# Altium PCB CP2104PCB.PcbDoc
Units mm, origin at the board's own origin, x right, y up, seen from the top; angles counter-clockwise.
Board outline 33 x 20 mm, 2 copper layers (Top Layer, Bottom Layer); 23 components, 28 nets, 104 pads, 148 vias.
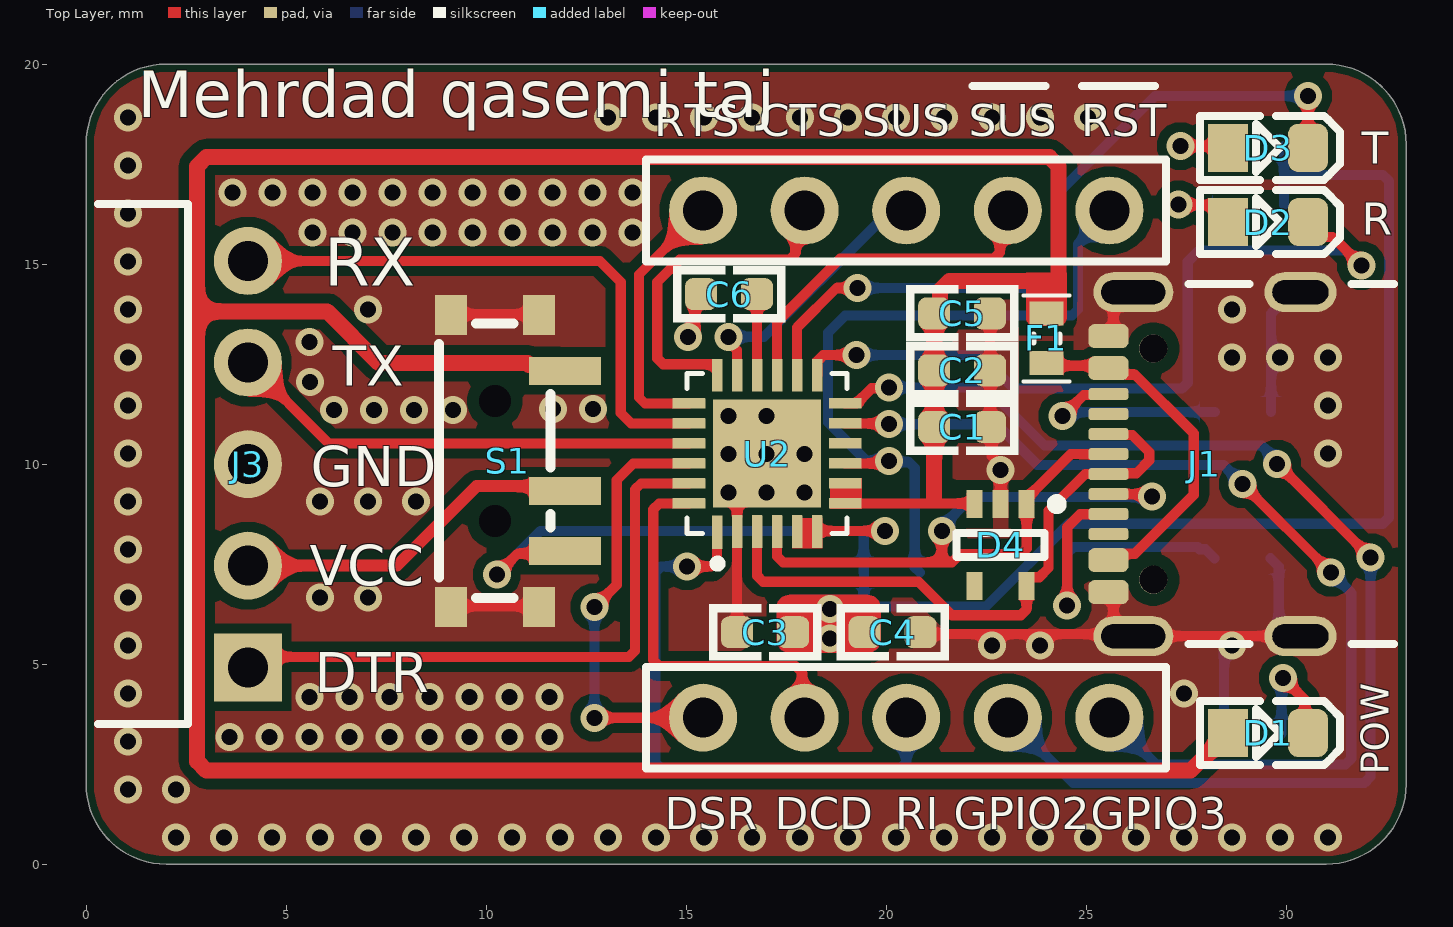
[diagram p0: Top Layer view]
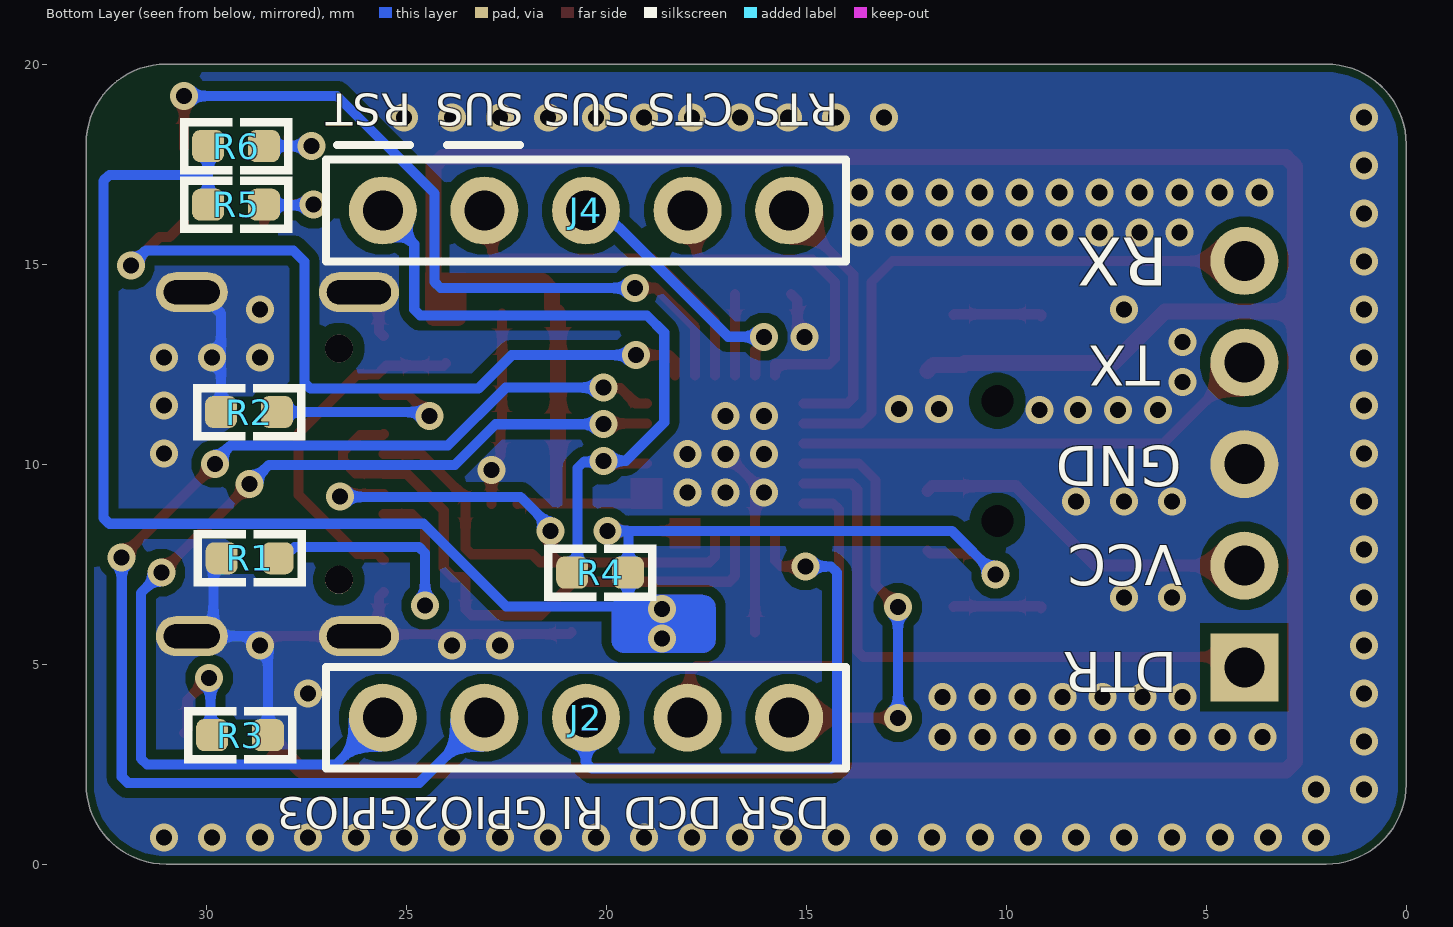
[diagram p1: Bottom Layer view, seen from below]
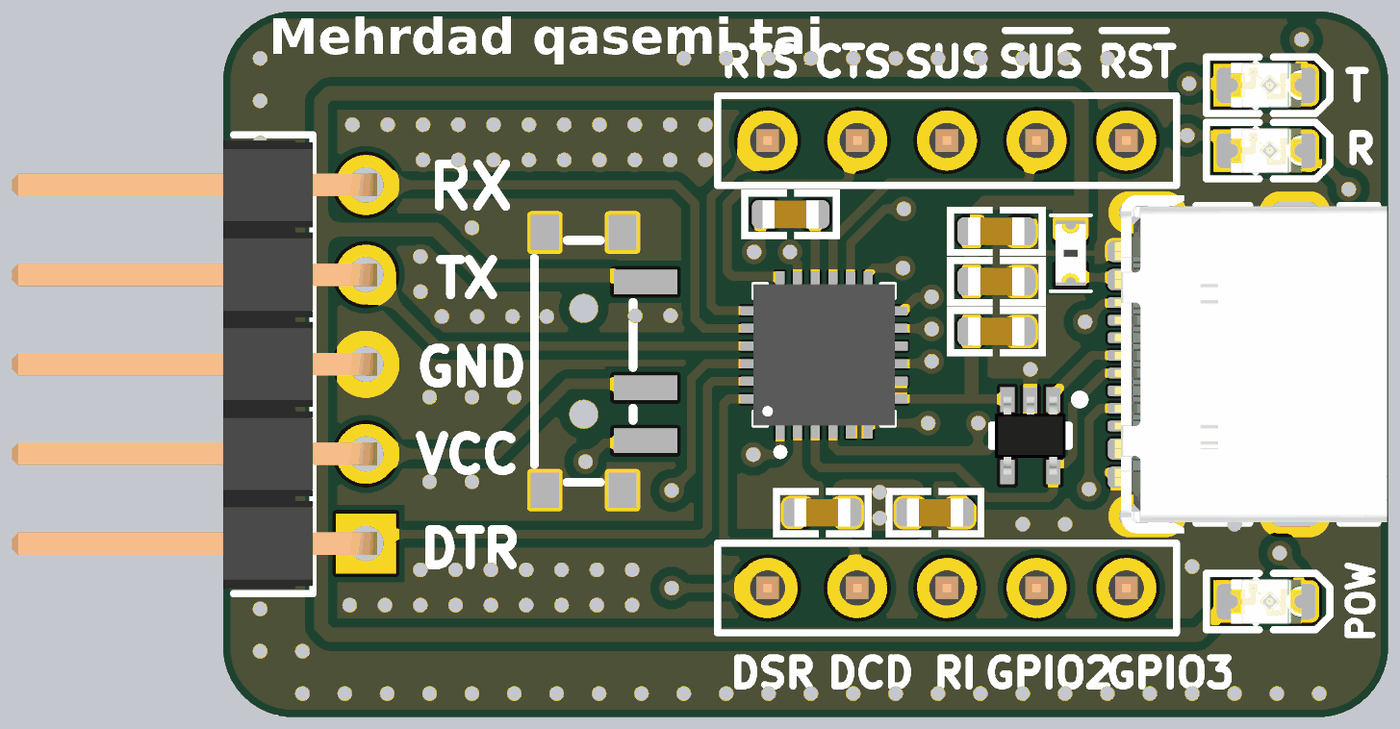
[diagram p2: 3D render of the assembled board from above, using the file's embedded part models]
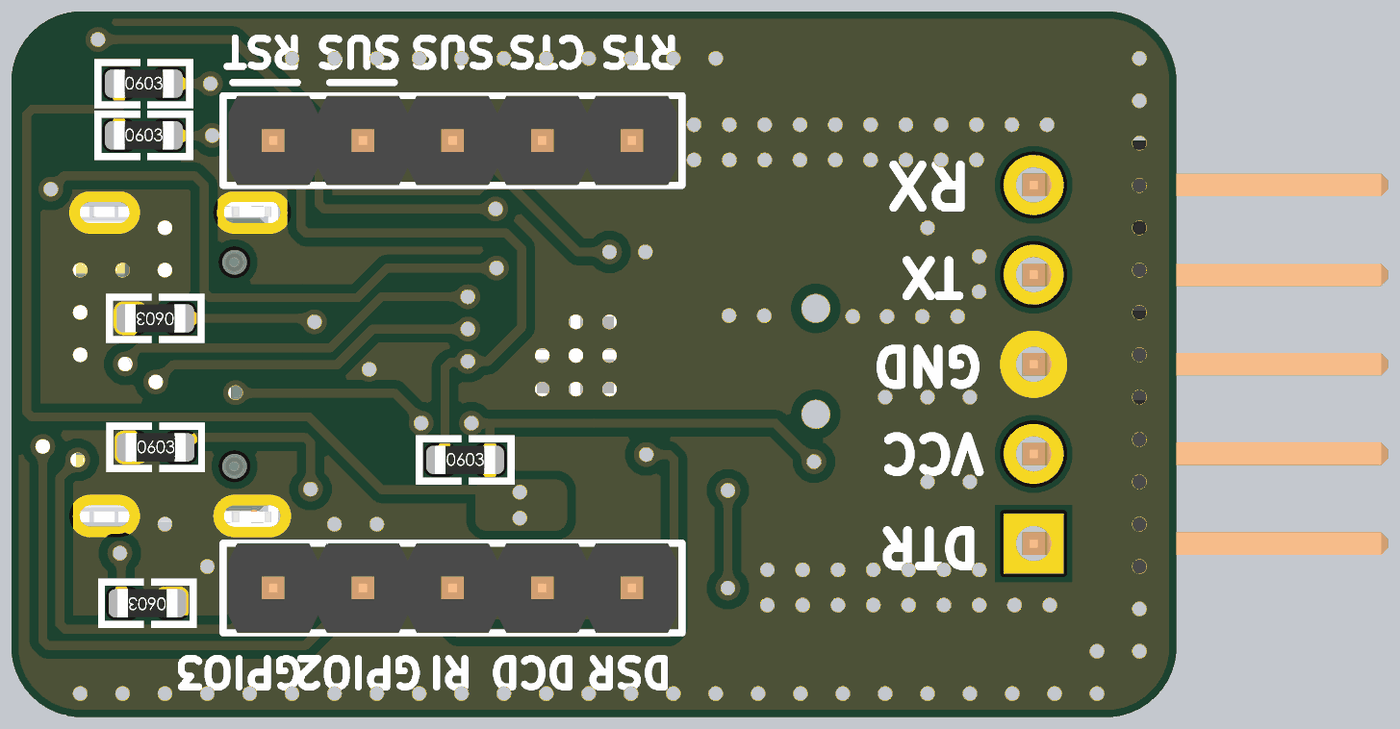
[diagram p3: 3D render of the assembled board from below, using the file's embedded part models]

## Layer stack, top to bottom
Top Solder: solder mask 0.0102, Solder Resist, Dk 3.5
Top Layer: signal copper 0.0356
Dielectric 1: dielectric 0.32, FR-4, Dk 4.8
Bottom Layer: signal copper 0.0356
Bottom Solder: solder mask 0.0102, Solder Resist, Dk 3.5

## Board outline
0,2 0,18 cw(c2,18) 2,20 31,20 cw(c31,18) 33,18 33,2 cw(c31,2) 31,0 2,0 cw(c2,2)

## Design rules (kind name [scope] priority, off if disabled: settings)
AcuteAngle [All] p1: minimum=9.00000000000000E+0001 checktracksonly=TRUE
BoardOutlineClearance [All] p1: gap=0.2 ignorepadtopadclearanceinfootprint=FALSE
Clearance Poly_Clearance [All vs InPolygon] p1: gap=0.25 ignorepadtopadclearanceinfootprint=TRUE except(0.3: Arc-Hole Track-Hole SMDPad-Hole THPad-Hole Via-Hole Fill-Hole Poly-Hole Region-Hole Text-Hole)
Clearance [All] p2: gap=0.2 ignorepadtopadclearanceinfootprint=TRUE except(0.3: Arc-Hole Track-Hole SMDPad-Hole THPad-Hole Via-Hole Fill-Hole Poly-Hole Region-Hole Text-Hole)
HoleSize [All] p1: absolutevalues=TRUE maxlimit=10 minlimit=0.4 maxpercent=80.000 minpercent=20.000
HoleToHoleClearance [All] p1: gap=0.3 allowstackedmicrovias=TRUE
MinimumAnnularRing [All] p1: minimumring=0.15
MinimumSolderMaskSliver [All] p1: minsoldermaskwidth=0.01
PolygonConnect PolygonConnect_4 [All vs IsNamedPolygon('GND_L02_P001')] p1: connectstyle=Direct reliefconductorwidth=0.254 reliefentries=4 polygonreliefangle="90 Angle" airgapwidth=0.254
PolygonConnect PolygonConnect_3 [All vs IsNamedPolygon('GND_L01_P000')] p2: connectstyle=Direct reliefconductorwidth=0.254 reliefentries=4 polygonreliefangle="90 Angle" airgapwidth=0.254
PolygonConnect PolygonConnect_2 [All vs IsNamedPolygon('GND_L02_P002')] p3: connectstyle=Direct reliefconductorwidth=0.254 reliefentries=4 polygonreliefangle="90 Angle" airgapwidth=0.254
PolygonConnect PolygonConnect_1 [All vs IsNamedPolygon('GND_L01_P000')] p4: connectstyle=Direct reliefconductorwidth=0.254 reliefentries=4 polygonreliefangle="90 Angle" airgapwidth=0.254
PolygonConnect [All] p5: connectstyle=Relief reliefconductorwidth=0.254 reliefentries=4 polygonreliefangle="90 Angle" airgapwidth=0.254
RoutingVias [All] p1: holewidth=0.4 width=0.7 viastyle="Through Hole" minholewidth=0.4 minwidth=0.7 maxholewidth=3 maxwidth=6
SilkToSolderMaskClearance [IsPad] p1: minsilkscreentomaskgap=0.01 clearancetoexposedcopper=TRUE
SolderMaskExpansion [All] p1: expansion=0.102 istentingtop=FALSE
Width [All] p1: maxlimit=10 minlimit=0.2 preferedwidth=0.2
26 further rules are at their usual default settings.

## Components (designator, comment, footprint, x,y, rotation, side; value= is the part's Value field where it differs from the comment)
C1 "10uF" C0603 21.9,10.928 r180 top
C2 "100nF" C0603 21.9,12.344 r180 top
C3 "4.7uF" C0603 16.974,5.798 r0 top
C4 "100nF" C0603 20.165,5.798 r180 top
C5 "1uF" C0603 21.9,13.767 r180 top
C6 "4.7uF" C0603 16.074,14.249 r0 top
D1 "LED805GRN" LED0805GRN 29.549,3.277 r0 top
D2 "LED805PINK" LED_Pink_0805 30.206,15.824 r0 top
D3 "LED805PINK" LED_Pink_0805 30.206,17.678 r0 top
D4 "SMF-05" SC70-5_N 22.865,7.976 r270 top locked
F1 "6V-0.5A" "FUSE0603 (1608)" 24.008,13.767 r270 top
J1 "USB4105" USBC_SMD_16_USB4105 25.558,10 r270 top
J2 "5" HDR_THT_5M_2.54mm 20.503,3.66 r0 bottom locked
J3 "5" HDR_THT_5M_2.54mm_RA 1.275,10 r270 top locked
J4 "5" HDR_THT_5M_2.54mm 20.503,16.34 r0 bottom locked
R1 "5.1K" R0603 28.911,7.645 r180 bottom
R2 "5.1K" R0603 28.925,11.303 r0 bottom
R3 "?" R0603 29.149,3.226 r0 bottom
R4 "4.7K" R0603 20.148,7.29 r180 bottom
R5 "220R" R0603 29.249,16.485 r180 bottom
R6 "220R" R0603 29.249,17.951 r180 bottom
S1 "Slide_Switch_SMD" Slide_Switch_SMD 20.969,6.923 r90 top
U2 "CP2104-F03-GM" CP2104-F03-GM 17.024,10.259 r90 top

## Footprints (in the part's own frame and the unit in brackets; to place one, negate y for a bottom-side part, rotate by r counter-clockwise, add the part's x,y. Pads: shape width x height; smd on the part's side, far side on the other; paste and mask are expansions set on the pad)
C0603 [mm] "CHIP Capacitor, 1.6X0.8mm, 0603 OPTIMIZED"
  rrect50% 0.8x0.8 smd mask+0.075: 1(-0.7,0) 2(0.7,0)
  Top Layer pour cut-out: -0.5,0.4 0.5,0.4 0.5,-0.4 -0.5,-0.4
  silkscreen extent -1.4,-0.7 1.4,0.7, body extent -0.8,-0.4 0.8,0.4, height 0.9
CP2104-F03-GM [mm]
  rrect7% 0.84x0.26 smd mask+0.06: 1(-1.962,1.25)
  rrect7% 0.82x0.26 smd mask+0.06: 2(-1.947,0.75) 3(-1.947,0.25) 4(-1.947,-0.25) 5(-1.947,-0.75) 6(-1.947,-1.25) 13(1.963,-1.25) 14(1.963,-0.75) 15(1.963,-0.25) 16(1.963,0.25) 17(1.963,0.75) 18(1.963,1.25)
  rrect7% 0.26x0.82 smd mask+0.06: 7(-1.242,-1.955) 8(-0.742,-1.955) 9(-0.242,-1.955) 10(0.258,-1.955) 11(0.758,-1.955) 12(1.258,-1.955) 19(1.258,1.955) 20(0.758,1.955) 21(0.258,1.955) 22(-0.242,1.955) 23(-0.742,1.955) 24(-1.242,1.955)
  rect 2.7x2.7 smd paste-2 mask+0.06: 25(0.008,0)
  silkscreen extent -2.85,-2 2.01,2, body extent -1.99,-2 2.01,2, height 0.81
"FUSE0603 (1608)" [mm]
  rect 0.6x0.85 smd: 1(0,0) 2(1.244,0)
  silkscreen extent -0.45,-0.58 1.7,0.58, body extent -0.2,-0.42 1.45,0.43, height 0.53
HDR_THT_5M_2.54mm [mm] "Pin Header, pitch 2.54 mm, THT, Vertical, single row, 5p"
  round 1.7 hole 1: 1(-5.08,0) 2(-2.54,0) 3(0,0) 4(2.54,0) 5(5.08,0)
  silkscreen extent -6.5,-1.27 6.5,1.27, body extent -6.35,-1.27 6.35,1.27, height 8.57
HDR_THT_5M_2.54mm_RA [mm] "Pin Header, pitch 2.54 mm, THT, Angled, single row, 5p"
  rect 1.7x1.7 hole 1: 1(5.08,2.77)
  round 1.7 hole 1: 2(2.54,2.77) 3(0,2.77) 4(-2.54,2.77) 5(-5.08,2.77)
  silkscreen extent -6.5,-0.98 6.5,1.27, body extent -6.35,-7.27 6.35,3.09, height 2.62
LED0805GRN [mm] "LED SMD 0805, GREEN"
  rect 1x1.2 smd paste-2 mask+0.075: 1(-1,0)
  rrect50% 1x1.2 smd paste-2 mask+0.075: 2(1,0)
  Top Layer pour cut-out: -0.5,0.8 0.5,0.8 0.5,-0.8 -0.5,-0.8
  silkscreen extent -1.7,-0.8 1.8,0.8, body extent -1,-0.63 1,0.63, height 0.7
LED_Pink_0805 [mm]
  rect 1x1.2 smd paste-2 mask+0.075: 1(-1.657,0.229)
  rrect50% 1x1.2 smd paste-2 mask+0.075: 2(0.343,0.229)
  Top Layer pour cut-out: -1.157,1.029 -0.157,1.029 -0.157,-0.571 -1.157,-0.571
  silkscreen extent -2.36,-0.57 1.14,1.03, body extent -1.66,-0.4 0.34,0.85, height 0.7
R0603 [mm] "CHIP Resistor 1/10 WATT, 1.6x0.8mm, 0603, OPTIMIZED"
  rrect50% 0.8x0.8 smd mask+0.075: 1(-0.7,0) 2(0.7,0)
  Top Layer pour cut-out: -0.5,0.4 0.5,0.4 0.5,-0.4 -0.5,-0.4
  silkscreen extent -1.4,-0.7 1.4,0.7, body extent -0.85,-0.4 0.85,0.4, height 0.56
SC70-5_N [mm]
  rect 0.7x0.4 smd: 1(-1.025,0.65) 2(-1.025,0) 3(-1.025,-0.65) 4(1.025,-0.65) 5(1.025,0.65)
  silkscreen extent -1.15,-1.1 0.3,1.53, body extent -1.1,-1 1.1,1, height 0.93
Slide_Switch_SMD [mm]
  rect 0.7x1.8 smd: 1(0.909,9.003) 2(2.409,9.003) 3(5.409,9.003)
  rect 1x0.8 smd: 4(-0.491,11.852) 4(-0.491,9.653) 4(6.809,11.852) 4(6.809,9.653)
  round 0 hole 0.8: 9(1.659,10.753) 10(4.659,10.753)
  silkscreen extent -0.27,9.36 6.59,12.15
USBC_SMD_16_USB4105 [mm] "CONN, USB, Type C, USB4105, popular*"
  rrect50% 0.6x1 smd mask+0.075: A1B12(3.2,0) A4B9(2.4,0) B1A12(-3.2,0) B4A9(-2.4,0)
  rrect50% 0.3x1 smd mask+0.075: A5(1.25,0) A6(0.25,0) A7(-0.25,0) A8(-1.25,0) B5(-1.75,0) B6(-0.75,0) B7(0.75,0) B8(1.75,0)
  oval 1x1.8 hole 0.6 slot 1.4 at 90 deg: SH1(-4.3,4.8) SH2(4.3,4.8)
  oval 1x2 hole 0.6 slot 1.6 at 90 deg: SH3(-4.3,0.62) SH4(4.3,0.62)
  round 0.7 hole 0.7 unplated: ""(-2.89,1.12) ""(2.89,1.12)
  silkscreen extent -4.5,2 4.5,7.14, body extent -4.79,-0.3 4.79,7.41, height 3.26

## Part data
C1 C2 C3 C4 C5 C6: library part CAP_SMD_MLCC_0603, "CAP, MLCC, -F, -V, MATERIAL, -%, 0201", ASSEMBLY=ASSEMBLY, MANF=-, MANF_P#=MANF_PART#, PARAM="-, -%", PARAM2=-V, PRICE="100= 1$"
D1: library part LED_SMD_0805_GRN, "LED, SMD, 0805, GREEN", ASSEMBLY=ASSEMBLY, DESC=DESCRIPTION, MANF=-, MANF_P#=-, PARAM=20mA, PARAM2=2.2V, PRICE=36t@Javan
D2 D3: library part LED_Pink, "LED, SMD, 0805, PINK"
D4: library part Semi_Diod_TVS_SMF05, "TVS Diode Array", Package=SC70-5, Rating=Rating?, Inflow=inflow?, Type=TVS, Validation=Valid
F1: library part "PPTC Resettable Fuses", Publisher="Majid Derhambakhsh"
J1: library part CONN_USBC_SMD_16_USB4105, "CONN, USB, Type C, USB 2.0, Right-Angle, SMD", MANF=GCT, MANF_P#=USB4105-GF-A, PARAM=5A, PRICE=1.5$
J2 J3 J4: library part Con_MPH_5x1_V_THT_2.54, "Header, single row, 5 pin", Package=Package?, Rating=Rating?, Inflow=7152, Type=Type?, Validation=NT
R1 R2 R3 R4 R5 R6: library part RES_SMD_0603, "RESISTOR, SMD", ASSEMBLY=ASSEMBLY, DESC=DESCRIPTION, DIST#=MOUSER, MANF=-, MANF_P#=-, PARAM=-W, PARAM2=1%, PRICE="100= 0.5$"
U2: "USB Bridge, USB to UART USB 2.0 UART Interface 24-QFN _4x4_"

## Via types
v1: diameter 0.7, hole 0.4, Top Layer to Bottom Layer, tented both sides, 148 vias

## Nets (pads, with @x,y where several pads share a name; then routed paths per layer and width w, separated by ;. In a path a pad name is that pad's centre, name@x,y a point inside that pad or via, vN(x,y) a via of type N, cw(c..) or ccw(c..) an arc to the next point about the centre after c; other vN are vias at no path point)
CP_D+: D4.5 J1.A6 J1.B6 U2.3 | length 15.6
  Top Layer w0.254: U2.3 16.774,7.21 16.923,7.061 20.808,7.061 21.646,6.223 23.365,6.223 23.513,6.372 23.513,6.949 D4.5 23.515,7.101 23.588,7.174 23.829,7.174 24.059,7.404 24.059,8.839 24.97,9.75 J1.A6 25.581,9.773 26.258,9.773 26.577,10.093 26.577,10.303 26.154,10.727 25.581,10.727 J1.B6
CP_D-: D4.1 J1.A7 J1.B7 U2.4 | length 18.4
  Top Layer w0.254: U2.4 17.274,7.693 17.423,7.544 21.392,7.544 ; v1(21.392,8.331) 21.392,7.544 ; J1.B7 26.595,9.25 v1(26.65,9.195) ; J1.A7 24.615,10.25 24.015,9.651 23.515,9.151 D4.1 23.515,7.896 23.367,7.747 21.849,7.747 21.646,7.544 21.392,7.544
  Bottom Layer w0.254: v1(21.392,8.331) 21.392,8.433 22.138,9.178 26.633,9.178 v1(26.65,9.195)
CTS: J4.2 U2.18 | length 8.7
  Top Layer w0.254: U2.18 15.774,12.493 15.771,12.496 14.429,12.496 14.28,12.645 14.28,14.554 14.839,15.113 17.589,15.113 17.738,15.262 17.738,16.115 J4.2
DCD: J2.2 U2.24 | length 9.7
  Top Layer w0.254: U2.24 14.327,9.017 14.179,8.868 14.179,5.102 14.327,4.953 17.735,4.953 17.895,4.792 17.895,3.728 J2.2
DSR: J2.1 U2.22 | length 10.9
  Top Layer w0.254: v1(12.705,3.658) v1(12.705,3.658) 15.422,3.659 J2.1 ; v1(12.705,6.426) 13.264,6.985 13.264,9.601 13.68,10.017 U2.22
  Bottom Layer w0.254: v1(12.705,3.658) v1(12.705,6.426)
DTR: J3.1 U2.23 | length 15.4
  Top Layer w0.254: J3.1@3.79,5.182 13.573,5.182 13.721,5.33 13.721,9.368 13.87,9.517 U2.23
GND: C1.1 C2.1 C3.1 C4.1 C5.1 C6.1 D4.2 J1.A1B12 J1.B1A12 J1.SH1 J1.SH2 J1.SH3 J1.SH4 J3.3 R1.1 R2.2 R3.1 S1.4 U2.2 U2.25 | length 36.6
  Top Layer w0.254: S1.4@9.116,6.432 9.116,6.407 9.129,6.394 9.182,6.447 11.301,6.447 S1.4@11.316,6.432 ; S1.4@9.116,13.732 9.116,13.707 9.129,13.694 9.182,13.747 11.301,13.747 S1.4@11.316,13.732 ; v1(15.042,13.183) 15.042,13.303 15.22,13.481 15.22,14.095 C6.1 ; C3.1 U2.2 16.274,9.517 U2.25 ; C4.1 20.914,5.749 26.13,5.749 J1.SH4 J1.SH2 ; C5.1 C2.1 C1.1 22.637,10.891 22.637,10.204 22.865,9.976 D4.2 ; J1.A1B12 25.682,6.676 J1.SH4@25.682,6.045 ; J1.B1A12 25.682,13.324 25.682,13.955 26.027,14.3 J1.SH3
  Bottom Layer w0.254: R3.1 28.449,5.551 28.598,5.7 J1.SH2 ; R1.1 29.816,7.44 J1.SH2@29.816,6.045 ; R2.2 29.625,13.765 30.16,14.3 J1.SH1
  other v1: 2.25,0.668 3.45,0.668 4.65,0.668 5.85,0.668 7.05,0.668 8.25,0.668 9.45,0.668 10.65,0.668 11.85,0.668 13.05,0.668 14.25,0.668 15.45,0.668 16.65,0.668 17.85,0.668 19.05,0.668 20.25,0.668 21.45,0.668 22.65,0.668 23.85,0.668 25.05,0.668 26.25,0.668 27.45,0.668 28.65,0.668 29.85,0.668 31.05,0.668 1.05,1.868 2.25,1.868 1.05,3.068 3.587,3.175 4.587,3.175 5.587,3.175 6.587,3.175 7.587,3.175 8.587,3.175 9.587,3.175 10.587,3.175 11.587,3.175 5.587,4.175 6.587,4.175 7.587,4.175 8.587,4.175 9.587,4.175 10.587,4.175 11.587,4.175 1.05,4.268 27.45,4.268 1.05,5.468 22.65,5.468 23.85,5.468 28.65,5.468 1.05,6.668 5.85,6.668 7.05,6.668 1.05,7.868 1.05,9.068 5.85,9.068 7.05,9.068 8.25,9.068 16.058,9.296 17.011,9.296 17.963,9.296 22.865,9.855 16.058,10.249 17.011,10.249 17.963,10.249 1.05,10.268 31.05,10.268 16.058,11.201 17.011,11.201 6.198,11.354 7.198,11.354 8.198,11.354 9.169,11.354 11.675,11.375 12.675,11.379 1.05,11.468 31.05,11.468 5.592,12.056 1.05,12.668 28.65,12.668 29.85,12.668 31.05,12.668 5.588,13.056 1.05,13.868 7.05,13.868 28.65,13.868 1.05,15.068 5.663,15.789 6.663,15.789 7.663,15.789 8.663,15.789 9.663,15.789 10.663,15.789 11.663,15.789 12.663,15.789 13.663,15.789 1.05,16.268 3.663,16.789 4.663,16.789 5.663,16.789 6.663,16.789 7.663,16.789 8.663,16.789 9.663,16.789 10.663,16.789 11.663,16.789 12.663,16.789 13.663,16.789 1.05,17.468 1.05,18.668 13.05,18.668 14.25,18.668 15.45,18.668 16.65,18.668 17.85,18.668 19.05,18.668 20.25,18.668 21.45,18.668 22.65,18.668 23.85,18.668 25.05,18.668
GPIO2: J2.4 U2.12 | length 30.4
  Top Layer w0.254: U2.12 19.259,11.517 19.64,11.897 20.056,11.897 v1(20.071,11.913) ; v1(29.774,10.008) v1(32.111,7.671)
  Bottom Layer w0.254: v1(20.071,11.913) 22.51,11.913 23.958,10.465 29.393,10.465 29.774,10.084 v1(29.774,10.008) ; J2.4 24.671,2.032 31.962,2.032 32.111,2.181 v1(32.111,7.671)
GPIO3: J2.5 U2.11 | length 25.4
  Top Layer w0.254: U2.11 18.982,11.014 20.056,11.014 v1(20.071,10.998) ; v1(28.911,9.5) v1(31.12,7.29)
  Bottom Layer w0.254: v1(20.071,10.998) 22.764,10.998 23.78,9.982 28.428,9.982 v1(28.911,9.5) ; J2.5 25.987,3.66 25.987,3.256 26.754,2.489 31.48,2.489 31.628,2.638 31.628,6.782 v1(31.12,7.29)
NetC6_2: C6.2 U2.16 | length 2
  Top Layer w0.254: U2.16 C6.2
NetD1_2: D1.2 R3.2 | length 3.1
  Top Layer w0.254: v1(29.927,4.648) 30.466,4.109 30.466,3.359 D1.2
  Bottom Layer w0.254: R3.2 29.888,3.265 29.888,4.609 v1(29.927,4.648)
NetD2_1: D2.1 R5.2 | length 2.7
  Top Layer w0.254: v1(27.31,16.485) 28.176,16.485 28.549,16.112 D2.1
  Bottom Layer w0.254: v1@27.311,16.475 R5.2@28.549,16.475
NetD2_2: D2.2 U2.13 | length 19.5
  Top Layer w0.254: U2.13 18.277,12.225 18.277,12.577 18.426,12.725 v1(19.259,12.725) ; D2.2 30.549,16.045 30.912,15.681 31.162,15.681 v1(31.882,14.961)
  Bottom Layer w0.254: v1(19.259,12.725) 22.357,12.725 23.196,11.887 27.39,11.887 27.539,12.036 27.539,15.062 27.818,15.342 31.501,15.342 v1(31.882,14.961)
NetD3_1: D3.1 R6.2 | length 2.4
  Top Layer w0.254: v1(27.361,17.951) 28.504,17.951 D3.1
  Bottom Layer w0.254: v1(27.361,17.951) R6.2
NetD3_2: D3.2 U2.14 | length 19
  Top Layer w0.254: U2.14 17.774,13.418 18.758,14.402 v1(19.284,14.402) ; D3.2 v1(30.549,19.202)
  Bottom Layer w0.254: v1(19.284,14.402) 24.139,14.402 24.288,14.551 24.288,16.764 26.726,19.202 v1(30.549,19.202)
NetF1_2: F1.2 J1.A4B9 J1.B4A9 | length 8.8
  Top Layer w0.254: F1.2 24.07,12.461 25.497,12.461 J1.B4A9 25.717,12.241 26.22,12.241 27.691,10.77 27.691,9.23 26.22,7.759 25.717,7.759 J1.A4B9
NetJ1_A5: J1.A5 R1.2 | length 8.3
  Top Layer w0.254: v1(24.526,6.461) 24.526,8.425 24.851,8.75 J1.A5
  Bottom Layer w0.254: v1(24.526,6.461) 24.526,7.776 24.675,7.925 27.789,7.925 27.84,7.873 27.983,7.873 R1.2
NetJ1_B5: J1.B5 R2.1 | length 5.2
  Top Layer w0.254: v1(24.415,11.201) 24.94,11.727 25.535,11.727 J1.B5
  Bottom Layer w0.254: v1(24.415,11.201) 24.536,11.201 24.637,11.303 R2.1
RI: J2.3 U2.1 | length 14.7
  Top Layer w0.254: v1(15.017,7.442) 15.625,7.442 15.774,7.591 U2.1
  Bottom Layer w0.254: v1(15.017,7.442) 14.378,7.442 14.229,7.293 14.229,2.536 14.378,2.388 20.354,2.388 20.503,2.536 J2.3
RST: J4.5 R4.1 U2.9 | length 18
  Top Layer w0.254: U2.9 v1@20.005,10.017
  Bottom Layer w0.254: R4.1 20.715,7.422 20.715,9.904 20.566,10.053 20.102,10.053 v1(20.071,10.084) 19.507,10.084 18.547,11.044 18.547,13.284 18.979,13.716 24.647,13.716 24.796,13.865 24.796,15.495 25.437,16.137 25.437,16.34 J4.5
RTS: J4.1 U2.19 | length 6.6
  Top Layer w0.254: U2.19 13.972,11.517 13.823,11.666 13.823,14.74 J4.1
RXD: J3.5 U2.20 | length 14.6
  Top Layer w0.254: J3.5 12.84,15.08 13.366,14.554 13.366,11.278 13.626,11.017 U2.20
SUSPEND: J4.3 U2.17 | length 6.8
  Top Layer w0.254: v1(16.058,13.183) 16.058,13.062 16.271,12.849 16.271,12.225 U2.17
  Bottom Layer w0.254: v1(16.058,13.183) 16.947,13.183 19.687,15.923 19.695,15.923 20.112,16.34 J4.3
SUSPEND_N: J4.4 U2.15 | length 8.8
  Top Layer w0.254: U2.15 17.274,13.56 18.852,15.138 22.694,15.138 22.843,15.287 22.843,16.14 J4.4
TXD: J3.4 U2.21 | length 11.9
  Top Layer w0.254: J3.4 6.068,10.517 U2.21
VBUS: C1.2 C2.2 C5.2 D1.1 D4.3 F1.1 S1.3 U2.7 U2.8 | length 88.2
  Top Layer w0.254: U2.8 U2.7 21.189,9.017 ; 21.206,9.017 D4.3@22.199,9.017 ; D4.3@22.142,9.074 D4.3@22.199,9.017 ; D4.3 D4.3@22.199,9.017
  Top Layer w0.4: S1.3 11.816,12.482 11.072,12.482 11.032,12.522 7.321,12.522 6.025,13.818 2.774,13.818 ; 21.206,9.087 21.2,9.092 C1.2 C2.2 C5.2 21.353,13.92 21.353,14.345 21.587,14.58 23.579,14.58 ; F1.1@23.813,13.867 23.913,13.767 F1.1 24.313,14.072 24.313,17.444 24.079,17.678 3.008,17.678 2.774,17.444 2.774,13.818 ; D1.1 27.609,2.337 3.008,2.337 2.774,2.571 2.774,13.818
VCC: J3.2 S1.2 | length 8.8
  Top Layer w0.3: J3.2 7.77,7.46 9.759,9.449 11.85,9.449 S1.2
VIO: C3.2 C4.2 R4.2 R5.1 R6.1 S1.1 U2.5 U2.6 | length 43.1
  Top Layer w0.254: v1(10.267,7.239) 10.794,7.766 11.9,7.766 S1.1 ; C3.2 C3.2@17.771,5.895 ; U2.5@17.771,8.309 U2.5 U2.6 18.274,8.328 18.277,8.331 v1(19.97,8.331) ; C4.2@19.237,5.57 C4.2
  Bottom Layer w0.254: v1(10.267,7.239) 11.359,8.331 19.44,8.331 ; R4.2@19.44,7.297 19.44,8.327 19.444,8.331 v1(19.97,8.331) ; R4.2 19.448,6.474 19.481,6.44 22.499,6.44 24.567,8.509 32.419,8.509 32.568,8.658 32.568,17.08 32.419,17.229 30.054,17.229 ; R5.1 29.949,17.229 R6.1
  other v1: 18.598,5.639 18.598,6.375
pads on no net: D4.4 J1. J1.A8 J1.B8 S1.9 S1.10 U2.10

## Polygon pours and split planes (outlines as drawn)
GND on Top Layer "GND_L01_P000" (solid, remove dead copper, pour order 0): 0,18 cw(c2,18) 2,20 31,20 cw(c31,18) 33,18 33,2 cw(c31,2) 31,0 2,0 cw(c2,2) 0,2
GND on Bottom Layer "GND_L02_P001" (solid, remove dead copper, pour order 1): 0,18 cw(c2,18) 2,20 31,20 cw(c31,18) 33,18 33,2 cw(c31,2) 31,0 2,0 cw(c2,2) 0,2

## Other copper
Top Layer:
  region net VBUS: 23.703,13.462 24.313,13.462 ccw(c24.313,13.665) 24.516,13.665 24.516,14.779 23.502,14.779 23.499,13.666 ccw(c23.703,13.666)
  region net VIO: 17.262,5.61 17.262,6.411 cw(c17.582,6.411) 17.582,6.731 19.538,6.731 cw(c19.538,6.407) 19.862,6.407 19.862,5.595 cw(c19.551,5.595) 19.551,5.283 17.589,5.283 cw(c17.589,5.61)
  region net VIO: 17.648,8.652 17.648,7.896 18.403,7.896 18.403,8.652
  region net VBUS: 18.598,9.645 18.598,8.889 19.386,8.889 19.386,9.645
Bottom Layer:
  region net VIO: 17.262,5.61 17.262,6.411 cw(c17.582,6.411) 17.582,6.731 19.538,6.731 cw(c19.538,6.407) 19.862,6.407 19.862,5.595 cw(c19.551,5.595) 19.551,5.283 17.589,5.283 cw(c17.589,5.61)

## Silkscreen, mask and mechanical layers (free items; w line width, h text height)
Top Overlay:
  lines w0.2: 22.154,19.456 23.983,19.456 ; 24.897,19.456 26.726,19.456 ; 14.003,2.39 27.003,2.39 27.003,4.93 14.003,4.93 14.003,2.39 ; 14.003,15.07 14.003,17.61 27.003,17.61 27.003,15.07 14.003,15.07
  text "Mehrdad qasemi taj" at 1.295,18.29 h2
  text "RTS" at 14.207,18.193 h0.8
  text "CTS" at 16.832,18.193 h0.8
  text "SUS" at 19.402,18.193 h0.8
  text "SUS" at 22.069,18.193 h0.8
  text "RST" at 24.884,18.193 h0.8
  text "T" at 31.895,17.507 h0.8
  text "R" at 31.895,15.729 h0.8
  text "RX" at 5.956,14.462 h1.2
  text "TX" at 6.164,11.954 h1
  text "GND" at 5.614,9.445 h1
  text "VCC" at 5.591,6.968 h1
  text "DTR" at 5.719,4.301 h1
  text "POW" at 32.563,2.233 h0.7 r90
  text "DSR" at 14.47,0.87 h0.8
  text "DCD" at 17.222,0.87 h0.8
  text "RI" at 20.223,0.87 h0.8
  text "GPIO2" at 21.689,0.87 h0.8
  text "GPIO3" at 25.118,0.87 h0.8
Bottom Overlay:
  lines w0.2: 22.154,17.983 23.983,17.983 ; 24.897,17.983 26.726,17.983
  text "RTS" at 14.197,19.255 h0.8 r180
  text "CTS" at 16.822,19.255 h0.8 r180
  text "SUS" at 19.392,19.255 h0.8 r180
  text "SUS" at 22.059,19.255 h0.8 r180
  text "RST" at 24.873,19.255 h0.8 r180
  text "RX" at 5.956,15.662 h1.2 r180
  text "TX" at 6.164,12.953 h1 r180
  text "GND" at 5.614,10.445 h1 r180
  text "VCC" at 5.591,7.967 h1 r180
  text "DTR" at 5.719,5.3 h1 r180
  text "DSR" at 14.394,1.67 h0.8 r180
  text "DCD" at 17.095,1.67 h0.8 r180
  text "RI" at 20.045,1.67 h0.8 r180
  text "GPIO2" at 21.46,1.67 h0.8 r180
  text "GPIO3" at 24.838,1.67 h0.8 r180
Mechanical 1:
  the board outline again, w0.2